# EAGLE board BrickPi 1.6 (EAGLE 6.3)
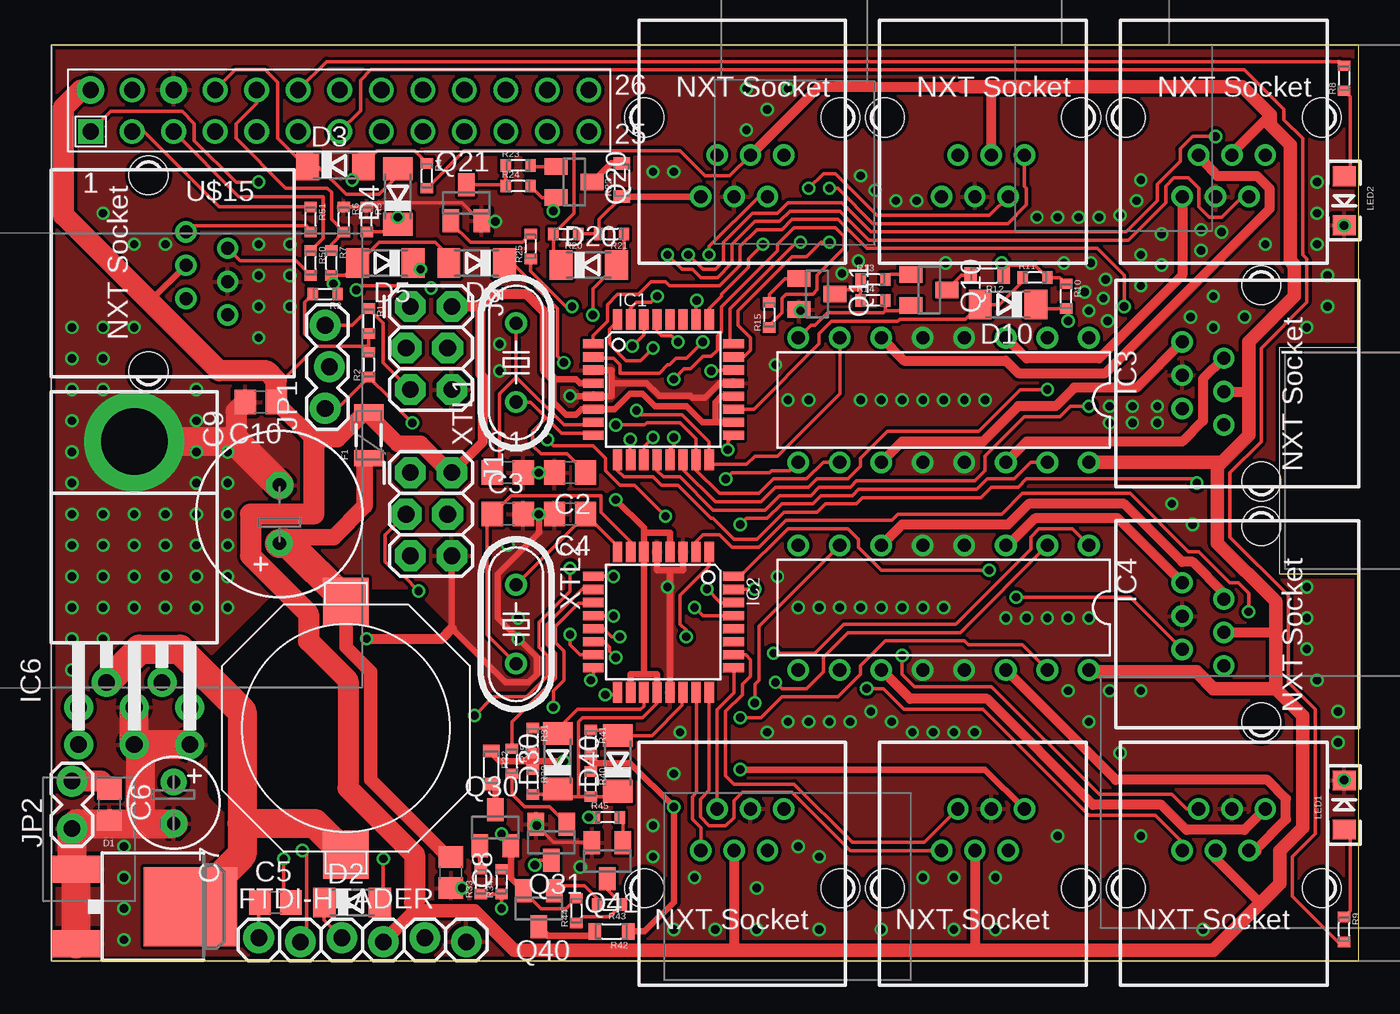
[diagram p0: board, top side]
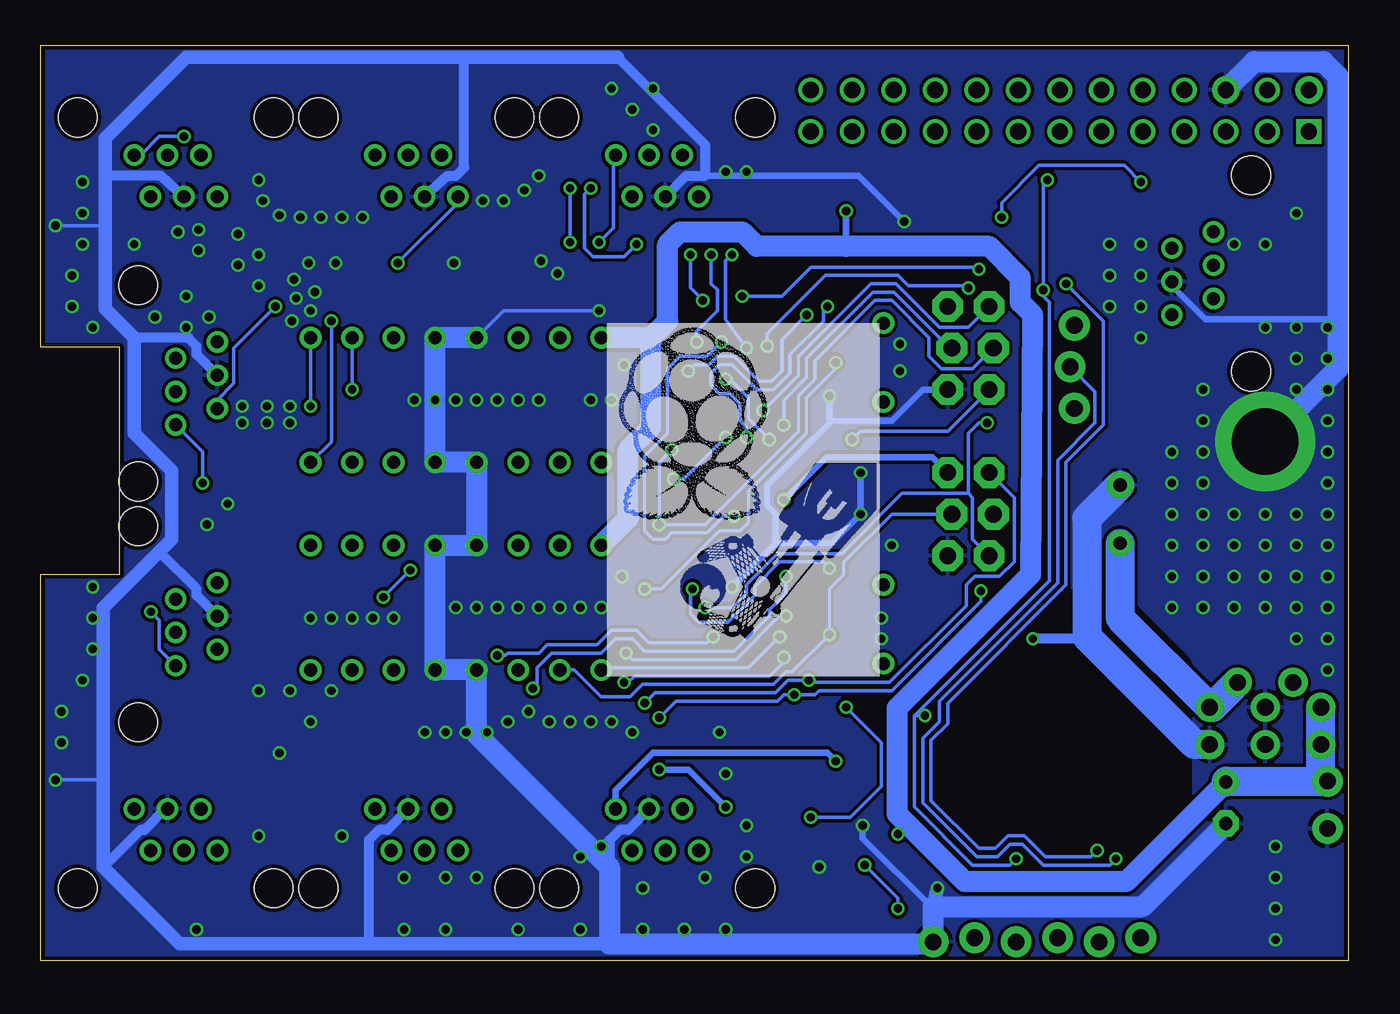
[diagram p1: board, bottom side, seen from below]

Size 80.01 x 56.01 mm. Coordinates in mm from the lower left corner, seen from the top.
Outline: 0,0 80.01,0 80.01,23.62 75.18,23.62 75.18,37.52 80.01,37.52 80.01,56.01 0,56.01 0,0
Copper layers (1*16): Top 0.035mm / dielectric 1.5mm / Bottom 0.035mm
Design rules "Fusion_eagle_rule_v1.1": minimum track width 6mil, minimum drill 12mil, track to track 6mil, track to pad 6mil, pad to pad 6mil, via to via 6mil, smd to smd 0mil, copper to edge 10mil, drill to drill 10mil, minimum pad ring 10mil, minimum via ring 6mil, stop-mask expansion 2mil, vias tented up to drill 100mil, thermal gap 10mil
tRestrict: area 10.4,6.6 to 25.7,21.8
bRestrict: area 10.4,6.6 to 25.7,21.8

## Footprints (pad centres in the part's own frame; a part is rotated, then mirrored left to right if it is on the bottom)
C0805 = smd 1.3 x 1.5: 1 -0.95,0; 2 0.95,0
E2,5-6 = drill 0.813 pad 1.6: + -1.27,0 | drill 0.813 pad 1.6 octagon: - 1.27,0
E3,5-10 = drill 0.813 pad 1.6: + -1.778,0 | drill 0.813 pad 1.6 octagon: - 1.778,0
DPAK = smd 1.651 x 2.921: 1 -2.286,-5.334; 3 2.286,-5.334 | smd 4.826 x 5.715: 4 0,1.651
SOD80C = smd 1.4 x 1.8: A 1.7,0; C -1.7,0
PTC-1206 = smd 1 x 1.8: 1 -1.4,0; 2 1.4,0
1X06_LOCK = drill 1.016 pad 1.88: 1 0,0; 2 2.54,-0.254; 3 5.08,0; 4 7.62,-0.254; 5 10.16,0; 6 12.7,-0.254
TQFP32-08 = smd 1.27 x 0.559: 1 -4.293,2.8; 2 -4.293,2; 3 -4.293,1.2; 4 -4.293,0.4; 5 -4.293,-0.4; 6 -4.293,-1.2; 7 -4.293,-2; 8 -4.293,-2.8; 17 4.293,-2.8; 18 4.293,-2; 19 4.293,-1.2; 20 4.293,-0.4; 21 4.293,0.4; 22 4.293,1.2; 23 4.293,2; 24 4.293,2.8 | smd 0.559 x 1.27: 9 -2.8,-4.293; 10 -2,-4.293; 11 -1.2,-4.293; 12 -0.4,-4.293; 13 0.4,-4.293; 14 1.2,-4.293; 15 2,-4.293; 16 2.8,-4.293; 25 2.8,4.293; 26 2,4.293; 27 1.2,4.293; 28 0.4,4.293; 29 -0.4,4.293; 30 -1.2,4.293; 31 -2,4.293; 32 -2.8,4.293
DIL16-ROUND-HEAT_DIS_SN754410 = drill 0.813: 1 -8.89,-3.81; 2 -6.35,-3.81; 3 -3.81,-3.81; 4 -1.27,-3.81; 5 1.27,-3.81; 6 3.81,-3.81; 7 6.35,-3.81; 8 8.89,-3.81; 9 8.89,3.81; 10 6.35,3.81; 11 3.81,3.81; 12 1.27,3.81; 13 -1.27,3.81; 14 -3.81,3.81; 15 -6.35,3.81; 16 -8.89,3.81
TO220-5-H = drill 1.016 pad 1.778: 1 -3.404,-21.59; 2 -1.702,-17.78; 3 0,-21.59; 4 1.702,-17.78; 5 3.404,-21.59 | drill 4.064 pad 6.096: 6 0,-3.048
TO220-H = drill 1.016 pad 1.778: 1 -3.404,-19.304; 2 0,-19.304; 3 3.404,-19.304 | drill 4.064 pad 6.096: 4 0,-3.048
2X3_LOCK = drill 1.016 pad 1.88 octagon: 1 0,0; 2 0,2.54; 3 2.54,-0.254; 4 2.54,2.286; 5 5.08,0; 6 5.08,2.54
1X03_LOCK = drill 1.016 pad 1.88: 1 0,0.127; 2 2.54,-0.127; 3 5.08,0.127
1X02_LOCK = drill 1.016 pad 1.88: 1 -0.178,0; 2 2.718,0
LED-1206 = smd 1.2 x 1.4: A -1.5,0; C 1.5,0
SOT23 = smd 1 x 1.4: 1 -0.95,-1.1; 2 0.95,-1.1; 3 0,1.1
0603 = smd 0.635 x 0.762: 1 -0.762,0; 2 0.762,0
0805 = smd 0.762 x 1.016: 1 -1.016,0; 2 1.016,0
NXT-SOCKET = drill 0.8 pad 1.3: 1 0,0; 2 -1,-2.54; 3 -2.04,0; 4 -3.04,-2.54; 5 -4.08,0; 6 -5.08,-2.54 | hole 2.36: -8.54,-4.84; 3.46,-4.84
INDUCTOR_PULSE_P0250.XXXNL = smd 2.794 x 2.921: P$1 0,7.747; P$2 0,-7.747
RASPBERRY-PI_REV1 = drill 1 square: 1 -41.91,21.59 | drill 1 pad 1.676: 2 -41.91,24.13; 6 -36.83,24.13 | drill 1: 3 -39.37,21.59; 4 -39.37,24.13; 5 -36.83,21.59; 7 -34.29,21.59; 8 -34.29,24.13; 9 -31.75,21.59; 10 -31.75,24.13; 11 -29.21,21.59; 12 -29.21,24.13; 13 -26.67,21.59; 14 -26.67,24.13; 15 -24.13,21.59; 16 -24.13,24.13; 17 -21.59,21.59; 18 -21.59,24.13; 19 -19.05,21.59; 20 -19.05,24.13; 21 -16.51,21.59; 22 -16.51,24.13; 23 -13.97,21.59; 24 -13.97,24.13; 25 -11.43,21.59; 26 -11.43,24.13
HC49/S = drill 0.813: 1 -2.413,0; 2 2.413,0

## Placement (x,y rotation side)
C1  22pF  [C0805]  27.94,29.84 0 top
C2  22pF  [C0805]  31.75,29.84 180 top
C3  22pF  [C0805]  27.94,27.3 0 top
C4  22pF  [C0805]  31.75,27.3 180 top
C5  0.1uf  [C0805]  13.72,3.56 0 top
C6  0.1uf  [C0805]  3.56,9.53 270 top
C7  120uf  [E2,5-6]  7.49,9.65 270 top
C8  0.1uf  [C0805]  24.46,5.39 270 top
C9  1000uf  [E3,5-10]  13.97,27.3 90 top
C10  0.1uf  [C0805]  12.83,34.16 180 top
D1  DIODE_SCHOTTKY_VS-6CWQ04FNTRPBF  [DPAK]  6.86,3.3 270 top
D2  [SOD80C]  18.41,3.56 0 top
D3  [SOD80C]  17.4,48.64 0 top
D4  [SOD80C]  21.21,46.74 90 top
D5  [SOD80C]  20.45,42.67 180 top
D6  [SOD80C]  26.04,42.67 180 top
D10  [SOD80C]  58.55,40.13 180 top
D20  [SOD80C]  32.89,42.55 0 top
D30  [SOD80C]  30.99,12.19 90 top
D40  [SOD80C]  34.67,12.06 90 top
F1  PTCSMD  [PTC-1206]  19.43,32.13 90 top
FTDI-HEADER  [1X06_LOCK]  12.7,1.4 0 top
IC1  ATMEGA48/88/168/328-TQFP-AU  [TQFP32-08]  37.47,34.92 0 top
IC2  ATMEGA48/88/168/328-TQFP-AU  [TQFP32-08]  37.47,20.7 270 top
IC3  SN754410  [DIL16-ROUND-HEAT_DIS_SN754410]  54.61,34.29 180 top
IC4  SN754410  [DIL16-ROUND-HEAT_DIS_SN754410]  54.61,21.59 180 top
IC5  LM2576  [TO220-5-H]  5.08,34.8 0 top
IC6  REGULATOR_5V_TO220-H_7805  [TO220-H]  5.08,34.8 0 top
J1  AVR_SPI_PRG_62X3_LOCK  [2X3_LOCK]  21.97,29.84 270 top
J2  AVR_SPI_PRG_62X3_LOCK  [2X3_LOCK]  21.97,40.01 270 top
JP1  [1X03_LOCK]  16.89,33.78 90 top
JP2  [1X02_LOCK]  1.27,8.26 90 top
LED1  [LED-1206]  79.12,9.53 90 top
LED2  [LED-1206]  79.12,46.48 270 top
Q10  [SOT23]  53.72,41.02 270 top
Q11  [SOT23]  46.86,40.77 270 top
Q20  [SOT23]  32,47.62 270 top
Q21  [SOT23]  25.4,46.35 0 top
Q30  [SOT23]  27.18,8.13 0 top
Q31  [SOT23]  30.61,7.24 180 top
Q40  [SOT23]  29.84,3.17 180 top
Q41  [SOT23]  34.04,6.1 180 top
R1  10k  [0603]  19.43,39.12 270 top
R2  10k  [0603]  19.43,36.45 90 top
R3  2k4  [0603]  16.76,40.77 180 top
R4  10k  [0603]  22.99,48.01 270 top
R5  4k7  [0603]  19.3,45.34 270 top
R6  4k7  [0603]  17.91,45.34 270 top
R7  2k4  [0603]  17.14,42.67 270 top
R8  220  [0603]  79.12,53.98 90 top
R9  220  [0603]  79.12,1.91 270 top
R10  10k  [0603]  62.1,40.64 270 top
R11  4k7  [0603]  60.2,41.78 0 top
R12  100  [0805]  57.28,41.91 180 top
R13  4k7  [0603]  50.29,41.66 0 top
R14  10k  [0603]  50.29,40.39 0 top
R15  4k7  [0603]  43.94,39.5 90 top
R20  10k  [0603]  31.5,44.45 180 top
R21  4k7  [0603]  34.29,44.45 180 top
R22  100  [0805]  34.92,47.75 90 top
R23  4k7  [0603]  28.57,48.64 0 top
R24  10k  [0603]  28.57,47.37 0 top
R25  4k7  [0603]  29.34,43.69 90 top
R30  10k  [0603]  29.46,10.92 270 top
R31  4k7  [0603]  29.46,13.46 270 top
R32  100  [0805]  26.92,11.81 270 top
R33  4k7  [0603]  26.29,4.83 90 top
R34  10k  [0603]  27.56,4.83 90 top
R35  4k7  [0603]  28.19,12.19 270 top
R40  10k  [0603]  33.02,10.79 270 top
R41  4k7  [0603]  33.02,13.34 270 top
R42  100  [0805]  34.29,1.78 180 top
R43  4k7  [0603]  34.16,3.43 180 top
R44  10k  [0603]  32.13,3.05 90 top
R45  4k7  [0603]  34.04,8.76 0 top
R50  2k4  [0603]  15.88,42.67 270 top
R51  2k4  [0603]  15.88,45.34 270 top
U$3  NXT-SOCKETREGULAR  [NXT-SOCKET]  69.22,46.74 180 top
U$4  NXT-SOCKETREGULAR  [NXT-SOCKET]  69.22,37.85 90 top
U$5  NXT-SOCKETREGULAR  [NXT-SOCKET]  69.22,23.11 90 top
U$7  NXT-SOCKETREGULAR  [NXT-SOCKET]  74.3,9.27 0 top
U$8  NXT-SOCKETREGULAR  [NXT-SOCKET]  54.48,46.74 180 top
U$9  NXT-SOCKETREGULAR  [NXT-SOCKET]  39.75,46.74 180 top
U$10  NXT-SOCKETREGULAR  [NXT-SOCKET]  44.83,9.27 0 top
U$11  NXT-SOCKETREGULAR  [NXT-SOCKET]  59.56,9.27 0 top
U$12  NXT-SOCKETREGULAR  [NXT-SOCKET]  10.79,39.5 270 top
U$14  INDUCTOR_PULSE_P0250.XXXNL  [INDUCTOR_PULSE_P0250.XXXNL]  18.03,14.22 0 top
U$15  RASPBERRY-PI_REV1  [RASPBERRY-PI_REV1]  44.32,29.13 0 top
XTL1  [HC49/S]  28.45,36.58 90 top
XTL2  [HC49/S]  28.45,20.57 270 top

## Library data of the parts
C1-C10 = rcl
D1 IC1-IC6 J1 J2 R1-R15 R20-R25 R30-R35 R40-R45 R50 R51 U$3-U$5 U$7-U$12 U$14 = zz My Parts
D2-D6 D10 D20 D30 D40 = diode
F1 FTDI-HEADER JP1 JP2 = zz SparkFun
LED1 LED2 = SparkFun-LED
Q10 Q11 Q20 Q21 Q30 Q31 Q40 Q41 = semicon-smd-ipc
U$15 = RaspberryPi
XTL1 XTL2 = crystal; OC_FARNELL: 1667008; OC_NEWARK: unknown

## Nets
+3V3: D4.C R5.2 U$15.1
+5V: C10.1 D10.C D20.C D30.C D40.C F1.2 FTDI-HEADER.4 IC1.4 IC1.6 IC1.18 IC1.20 IC2.4 IC2.6 IC2.18 IC2.20 IC3.16 IC4.16 J1.2 J2.2 R1.2 R2.2 R3.2 R4.2 R10.2 R20.2 R30.2 R40.2 U$3.4 U$4.4 U$5.4 U$7.4 U$8.4 U$9.4 U$10.4 U$11.4 U$12.4 U$15.2
FTDI-RESET: C5.2 JP1.2
FTDI-TX: D2.C FTDI-HEADER.3
GND: C1.2 C2.2 C3.2 C4.2 C6.2 C7.- C8.2 C9.- C10.2 D1.1 D1.3 FTDI-HEADER.6 IC1.3 IC1.5 IC1.21 IC2.3 IC2.5 IC2.21 IC3.4 IC3.5 IC3.12 IC3.13 IC4.4 IC4.5 IC4.12 IC4.13 IC5.3 IC5.5 IC5.6 IC6.2 IC6.4 J1.6 J2.6 JP2.1 LED1.C LED2.C Q11.2 Q21.2 Q31.2 Q41.2 R5.1 R6.1 U$3.3 U$4.3 U$5.3 U$7.3 U$8.3 U$9.3 U$10.3 U$11.3 U$12.3 U$15.6
M1-RESET: IC1.29 J2.5 JP1.3 R1.1
M1-TX: D5.C IC1.31
M2-RESET: IC2.29 J1.5 JP1.1 R2.1
M2-TX: D6.C IC2.31
M-RX: D2.A D3.A IC1.30 IC2.30 R4.1
MADIR: IC1.16 IC3.7 J2.1
MAEN: IC1.12 IC3.1
MAO0: IC3.3 U$3.1
MAO1: IC3.6 U$3.2
MAPWM: IC1.14 IC3.2
MAT0: IC1.32 U$3.5
MAT1: IC1.2 U$3.6
MBDIR: IC1.17 IC3.15 J2.3
MBEN: IC1.13 IC3.9
MBO0: IC3.11 U$4.1
MBO1: IC3.14 U$4.2
MBPWM: IC1.15 IC3.10 J2.4
MBT0: IC1.1 U$4.5
MBT1: IC1.9 U$4.6
MCDIR: IC2.16 IC4.7 J1.1
MCEN: IC2.12 IC4.1
MCO0: IC4.3 U$5.1
MCO1: IC4.6 U$5.2
MCPWM: IC2.14 IC4.2
MCT0: IC2.32 U$5.5
MCT1: IC2.2 U$5.6
MDDIR: IC2.17 IC4.15 J1.3
MDEN: IC2.13 IC4.9
MDO0: IC4.11 U$7.1
MDO1: IC4.14 U$7.2
MDPWM: IC2.15 IC4.10 J1.4
MDT0: IC2.1 U$7.5
MDT1: IC2.9 U$7.6
N$1: D1.4 IC5.2 U$14.P$2
N$2: C5.1 FTDI-HEADER.1
N$3: LED2.A R8.1
N$4: LED1.A R9.1
N$5: C1.1 IC1.7 XTL1.2
N$6: R9.2 U$15.13
N$7: C2.1 IC1.8 XTL1.1
N$8: Q11.1 R15.2
N$9: Q20.3 R22.2
N$10: Q21.1 R25.2
N$11: R6.2 R7.1 U$15.10
N$12: R8.2 U$15.12
N$13: Q11.3 R13.1 R14.1
N$14: C3.1 IC2.7 XTL2.2
N$15: C4.1 IC2.8 XTL2.1
N$16: Q21.3 R23.1 R24.1
N$17: Q20.1 R23.2
N$18: IC2.27
N$19: IC2.28
N$20: Q30.3 R32.2
N$21: Q31.1 R35.2
N$22: Q10.1 R13.2
N$23: Q31.3 R33.1 R34.1
N$24: Q30.1 R33.2
N$25: Q10.3 R12.2
N$26: Q40.3 R42.2
N$27: IC1.27
N$28: IC1.28
N$29: R50.2 U$12.5
N$30: R51.2 U$12.6
N$31: R51.1 U$15.3
N$32: R50.1 U$15.5
N$33: Q41.1 R45.2
N$34: Q41.3 R43.1 R44.1
N$35: Q40.1 R43.2
REG_OUT: C8.1 C9.+ F1.1 IC5.4 IC6.3 U$14.P$1
RPI-FTDI-RX: D5.A D6.A FTDI-HEADER.2 R3.1 R7.2
RPI-TX: D3.C D4.A U$15.8
S1ADC: D10.A IC1.19 R11.1
S1ANA: R10.1 R11.2 R12.1 U$8.1
S1POW: IC1.10 R15.1
S1SCL: IC1.25 U$8.5
S1SDA: IC1.23 U$8.6
S2ADC: D20.A IC1.22 R21.1
S2ANA: R20.1 R21.2 R22.1 U$9.1
S2POW: IC1.11 R25.1
S2SCL: IC1.26 U$9.5
S2SDA: IC1.24 U$9.6
S3ADC: D30.A IC2.19 R31.1
S3ANA: R30.1 R31.2 R32.1 U$10.1
S3POW: IC2.10 R35.1
S3SCL: IC2.25 U$10.5
S3SDA: IC2.23 U$10.6
S4ADC: D40.A IC2.22 R41.1
S4ANA: R40.1 R41.2 R42.1 U$11.1
S4POW: IC2.11 R45.1
S4SCL: IC2.26 U$11.5
S4SDA: IC2.24 U$11.6
VCC: C6.1 C7.+ IC3.8 IC4.8 IC5.1 IC6.1 JP2.2 Q10.2 Q20.2 Q30.2 Q40.2 R14.2 R24.2 R34.2 R44.2

## Tracks (layer width: path | path; a pad name or v marks a point on that pad's centre or on a via)
+3V3  (via drill 0.51)
  Top 0.203: R5.2 20.75,44.58 D4.C v21.21,45.47 | U$15.1 3.63,51.94 8,51.94 8.76,51.18 8.76,50.16 11.3,47.62 v12.7,47.62
  Bottom 0.203: v12.7,47.62 13.72,48.64 18.92,48.64 21.21,46.35 v21.21,45.47
+5V  (via drill 0.51)
  Top 0.203: 16.26,37.59 14.16,35.5 13.78,35.5 | 16.26,37.59 15.49,38.35 15.49,40.26 R3.2 | D10.C 60.5,39.88 R10.2 62.23,39.75 v62.23,39.12 | R2.2 19.43,37.59 | 19.43,37.59 R1.2 | 16.26,37.59 19.43,37.59 | D20.C 30.73,43 R20.2 32,45.72 32,49.53 | R4.2 25.27,49.53 32,49.53 | U$9.4 41.52,48.01 40.01,48.01 38.48,49.53 32,49.53 | R30.2 30.78,10.16 D30.C 31.32,10.03 32.26,10.03 | D40.C 34.34,10.03 R40.2 32.26,10.03 | IC2.20 37.06,15.73 36.2,14.86 32.51,14.86 32.26,14.61 32.26,10.03
  Top 0.406: IC2.18 35.47,17.53 36.32,17.53 | 36.32,17.53 37.06,17.53 IC2.20 | 36.27,26.16 IC2.6 36.27,17.58 36.32,17.53 | 36.27,26.16 37.08,26.16 37.87,26.16 IC2.4 | U$12.4 6.03,40.32 | v34.54,28.19 36.27,26.47 36.27,26.16 | IC1.4 32.37,35.33 32.13,35.56 30.73,35.56 30.73,34.16 31.5,33.4 32.13,33.4 32.45,33.73 IC1.6 34.49,33.73 35.43,34.67 36.2,34.67 36.96,33.91 38.86,33.91 39.75,33.02 39.85,32.92 40.64,32.92 40.77,32.92 | IC1.18 40.77,32.92 | IC1.20 41,34.52 40.64,34.16 40.64,33.05 40.77,32.92
  Top 0.61: U$8.4 57.52,53.46 57.53,53.47 | 72.25,49.4 74.61,51.75 | U$7.4 71.25,6.21 73.98,3.49 | U$11.4 56.52,0.64 | U$10.4 41.79,0.75 | U$9.4 46.98,53.47 55.75,53.47 | U$5.4 74.92,20.07 74.93,20.07 | U$4.4 73.27,34.81 73.28,33.78 | J1.2 26.42,31.75 26.42,35.69 26.29,35.81 26.29,40.01 | 26.29,40.01 J2.2 | 26.29,40.01 27.05,40.77 29.08,40.77 30.23,39.62 30.23,36.07 30.73,35.56
  Top 0.813: 56.52,0.64 71.12,0.64 73.98,3.49 75.18,4.7 75.18,6.73 76.58,8.13 76.58,14.99 74.93,16.64 | 56.52,0.64 41.91,0.64 | 41.91,0.64 34.29,0.64 31.88,0.64 28.32,0.64 25.91,3.05 23.37,3.05 22.23,3.05 | U$3.4 72.25,49.4 | 56.52,0.64 | 41.79,0.75 41.91,0.64 | 55.75,53.47 57.53,53.47 72.9,53.47 74.61,51.75 74.61,51.12 75.82,49.91 75.82,42.8 76.07,42.55 76.07,40.64 73.28,37.85 73.28,33.78 73.28,32.13 71.63,30.48 71.37,30.48 | 22.23,3.05 FTDI-HEADER.4 | IC3.16 71.37,30.48 | IC4.16 63.63,17.65 70.1,17.65 71.12,16.64 74.93,16.64 | 71.37,30.48 71.37,25.53 74.93,21.97 74.93,20.07 74.93,16.64 | 22.23,3.56 22.23,3.05
  Top 1.016: F1.2 19.18,33.53 17.53,31.88 16.06,31.88 C10.1 | J1.2 24.38,29.84 22.61,31.62 21.21,31.62 19.43,33.4 F1.2 | F1.2
  Top 1.27: U$15.2 1.83,53.26 0.76,52.2 0.76,45.59 6.03,40.32 10.29,36.07 13.21,36.07 13.78,35.5 C10.1 | 16.06,31.88 16.06,27.3 12.19,27.3 12.19,24.77 15.75,21.21 15.75,19.56 18.16,17.14 18.16,10.54 22.23,6.48 22.23,3.56
  Bottom 0.203: v62.23,39.12 62.23,31.75 IC3.16
  Bottom 0.406: J1.2 25.46,30.8 31.94,30.8 v34.54,28.19
FTDI-RESET  (via drill 0.51)
  Top 0.203: C5.2 14.22,4 v14.22,6.22
  Bottom 0.203: JP1.2 15.49,34.8 15.49,32.89 17.78,30.61 17.78,23.11 25.02,15.88 25.02,14.61 26.04,13.59 26.04,9.65 22.73,6.35 21.46,6.35 20.7,7.11 19.94,7.11 18.67,5.84 14.61,5.84 v14.22,6.22
FTDI-TX
  Top 0.203: FTDI-HEADER.3 16.71,2.46 D2.C
GND  (via drill 0.51)
  Top 0.203: C4.2 v29.84,27.3 C3.2 | C2.2 v29.84,29.84 C1.2 | LED1.C v79.12,11.05 | LED2.C v79.12,44.96 | Q11.2 45.78,39.82 v45.85,39.75 | R6.1 R5.1 19.56,46.35 25.15,46.35 26.25,45.26 Q21.2 | Q41.2 33.04,7.24 30.73,7.24 v29.72,8.26 29.66,8.32 Q31.2
  Top 0.406: IC2.5 37.06,23.88 37.85,23.88 | 37.85,23.88 37.97,23.88 38.66,23.88 IC2.3 | IC2.21 37.87,22.86 | 37.87,22.86 37.87,23.86 37.85,23.88 | IC1.3 34.29,36.12 34.29,35.31 | 34.29,35.31 34.29,34.52 IC1.5 31.77,34.52 v31.75,34.54 | v29.84,27.3 29.84,26.16 27.3,23.62 27.3,20.95 29.72,18.54 29.72,17.53 29.21,17.02 27.81,17.02 24.51,20.32 J1.6 | v37.72,22.86 37.87,22.86 | 34.29,35.31 34.31,35.33 36.43,35.33 37.21,34.54 39.12,34.54 39.24,34.42 40.01,34.42 40.89,35.31 41.74,35.31 IC1.21 | v27.18,45.21 26.39,45.21 Q21.2 | 29.66,8.32 v29.72,8.26
  Top 0.61: v19.3,19.68 23.88,19.68 24.51,20.32
  Top 0.813: v25.15,4.45 25.15,4.44 C8.2
  Top 1.27: C6.2 3.56,8.38 | C10.2 11.3,33.59 11.3,31.75
  Top 1.778: D1.3 D1.1 1.27,5.84 JP2.1 1.57,8.38 3.56,8.38 5.46,8.38 | 5.46,8.38 C7.- | C9.- 11.3,31.75 IC6.4 | IC5.5 5.46,13.21 | 5.46,13.21 IC5.3 IC6.2 | 5.46,8.38 5.46,13.21
  Bottom 0.203: v79.12,11.05 76.2,11.05 | v79.12,44.96 76.07,44.96 | v45.85,39.75 51.69,39.75 IC3.5
  Bottom 0.406: 35.05,25.53 31.62,25.53 v29.84,27.3 v29.84,29.84 | 35.05,25.53 v37.72,22.86 | U$12.3 10.79,41.27 8.76,39.24 0.64,39.24 | J2.6 26.04,34.92 27.94,33.02 31.62,33.02 | 31.62,33.02 35.56,29.08 35.56,27.81 35.05,27.3 35.05,25.53 | 31.62,33.02 31.75,33.15 v31.75,34.54 | 39.37,48.01 29.97,48.01 v27.18,45.21 | v29.72,8.26 29.72,7.49 25.4,3.17
  Bottom 0.61: U$9.3 40.52,48.01 39.37,48.01 39.37,49.91 44.7,55.24 | U$8.3 55.13,48.01 54.61,48.01 54.1,48.51 54.1,55.24 | U$10.3 44.06,8 44.58,8 45.21,7.37 45.21,5.71 | U$11.3 58.79,8 59.31,8 59.94,7.37 59.94,1.02 | U$4.3 70.48,37.08 70.48,37.59 70.99,38.1 74.3,38.1 | U$3.3 72.65,48.01 76.07,48.01 | 72.39,9.27 73.66,8 73.91,8 76.2,5.71 | U$5.3 70.48,22.34 70.48,22.73 72.77,25.02 | 16,19.81 16.13,19.68 v19.3,19.68
  Bottom 0.813: 45.21,1.02 59.94,1.02 71.5,1.02 76.2,5.71 76.2,11.05 76.2,21.59 72.77,25.02 72.01,25.78 72.01,29.97 74.3,32.26 74.3,38.1 76.07,39.88 76.07,44.96 76.07,48.01 76.07,50.29 71.12,55.24 54.1,55.24 44.7,55.24 | U$7.3 72.39,9.27 | 25.4,3.3 v25.15,4.45
  Bottom 1.27: IC3.5 IC3.4 IC3.13 IC3.12 IC4.5 IC4.4 IC4.13 IC4.12 53.34,13.84 45.21,5.71 45.21,1.02 25.4,1.02 FTDI-HEADER.6 25.4,3.17 25.4,3.3 12.57,3.3 C7.- | U$15.6 5.77,54.99 1.52,54.99 0.64,54.1 0.64,39.24 0.64,36.2 IC6.4
  Bottom 1.778: IC5.5 9.4,13.21 16,19.81 16,27.05 C9.-
  other vias: 1.27,27.3 5.08,27.3 3.17,27.3 6.99,27.3 8.89,27.3 1.27,25.4 3.17,25.4 5.08,25.4 6.99,25.4 8.89,25.4 10.79,29.21 10.79,31.11 8.89,29.21 8.89,31.11 8.89,33.02 1.27,33.02 1.27,31.11 1.27,29.21 1.27,23.5 3.17,23.5 5.08,23.5 6.99,23.5 8.89,23.5 8.89,21.59 6.99,21.59 5.08,21.59 3.17,21.59 1.27,21.59 10.79,27.3 10.79,25.4 10.79,23.5 10.79,21.59 1.27,19.68 3.17,19.68 1.27,17.78 4.45,1.27 4.45,3.17 4.45,5.08 4.45,6.99 14.61,41.91 12.7,41.91 12.7,40.01 14.61,40.01 12.7,38.1 12.7,43.81 14.61,43.81 6.99,43.81 5.08,43.81 3.17,45.72 1.27,34.92 3.17,34.92 8.89,34.92 43.81,13.97 45.09,14.61 46.35,14.61 51.44,14.61 52.7,13.97 53.98,13.97 55.24,13.97 56.52,13.97 66.67,7.62 70.48,1.91 57.78,1.91 57.78,5.08 61.59,7.62 55.24,1.91 55.24,5.08 53.34,5.08 46.99,1.91 43.18,4.45 46.99,6.35 50.8,1.91 45.72,6.99 62.23,16.51 63.5,14.61 65.41,12.7 64.77,16.51 66.67,16.51 78.74,13.34 78.74,15.24 77.47,17.14 76.83,19.05 76.83,20.95 76.83,22.86 76.83,38.73 78.11,40.01 78.11,41.91 77.47,43.81 77.47,45.72 77.47,47.62 60.33,45.47 62.87,45.47 64.14,45.47 65.41,45.59 66.67,47.75 52.96,46.48 51.69,46.48 50.42,47.12 49.53,48.01 45.09,53.34 43.81,52.07 42.55,50.8 42.55,53.34 47.62,14.61 38.1,11.43 38.1,1.91 40.64,1.91 32.38,5.71 36.83,8.26 38.48,13.97 43.18,1.91 36.83,6.35 39.37,5.08 48.9,14.61 50.16,15.24 28.57,19.68 28.57,20.95 27.94,25.4 69.85,26.67 68.58,27.94 67.94,44.45 67.94,42.55 66.67,41.27 66.67,43.18 71.12,38.73 71.12,40.64 74.3,43.81 64.64,39.12 63.5,39.75 64.39,40.51 63.25,40.89 64.52,41.66 63.63,42.67 61.98,42.67 64.77,33.91 64.77,32.89 67.69,32.89 67.69,33.91 66.17,33.91 66.17,32.89 69.72,39.37 73.03,39.37 70.36,44.7 71.63,44.58 70.36,43.43 61.59,45.47 66.42,46.48 1.27,36.83 3.17,36.83 1.27,38.73 3.17,38.73 5.08,38.73 38.1,48.26 36.83,48.26 48.39,42.04 49.4,42.8 54.74,42.67 44.32,36.45 57.15,34.29 54.61,34.29 53.34,34.29 52.07,34.29 50.8,34.29 49.53,34.29 55.88,34.29 46.35,34.29 45.09,34.29 54.61,21.59 53.34,21.59 52.07,21.59 50.8,21.59 49.53,21.59 48.26,21.59 46.99,21.59 45.72,21.59 44.45,23.5 58.42,20.95 59.69,20.95 60.96,20.95 62.23,20.95 63.5,20.95 27.43,37.72 27.43,36.07
  pour Top (isolate 0.203): 0,56.01 80.01,56.01 80.01,37.47 75.18,37.47 75.18,23.62 80.01,23.62 80.01,0 0,0
  pour Bottom (isolate 0.203): 0,56.01 80.01,56.01 80.01,37.47 75.18,37.47 75.18,23.62 80.01,23.62 80.01,0 0,0
M1-RESET  (via drill 0.51)
  Top 0.203: IC1.29 37.06,38.5 37.34,38.23 37.97,38.23 v38.35,37.85 | v37.59,27.18 35.69,29.08 34.8,29.08 33.91,29.97 33.91,30.73 33.15,31.5 30.73,31.5 v30.35,31.88 | JP1.3 18.41,38.86 R1.1 20.32,38.99 20.32,36.58 J2.5
  Bottom 0.203: v38.35,37.85 39.24,36.96 40.89,36.96 41.66,36.2 41.66,32.26 43.05,30.86 43.05,26.29 42.55,25.78 41.78,25.78 41.4,26.16 39.24,26.16 38.23,27.18 v37.59,27.18 | v30.35,31.88 29.84,32.38 24.51,32.38 J2.5
M1-TX  (via drill 0.51)
  Top 0.203: IC1.31 35.47,39.91 35.81,40.26 36.7,40.26 v37.08,40.64 | D5.C v22.61,42.29
  Bottom 0.203: v37.08,40.64 34.67,40.64 32.89,42.42 22.73,42.42 v22.61,42.29
M2-RESET  (via drill 0.51)
  Top 0.203: IC2.29 41.74,21.08 39.88,21.08 v39.37,21.59 | v22.1,32.89 20.7,34.29 20.7,34.42 R2.1 17.53,33.78 JP1.1
  Bottom 0.203: J1.5 22.99,25.78 22.99,28.32 23.24,28.57 | v39.37,21.59 37.72,21.59 36.83,22.48 36.83,22.99 34.92,24.89 30.99,24.89 27.3,28.57 23.24,28.57 | v22.1,32.89 22.61,32.89 23.24,32.26 23.24,28.57
M2-TX  (via drill 0.51)
  Top 0.203: IC2.31 43.02,22.7 v43.05,22.73 | v31.37,36.58 30.99,36.96 30.99,39.88 28.19,42.67 D6.C
  Bottom 0.203: v43.05,22.73 42.04,22.73 38.48,26.29 37.21,26.29 36.7,26.8 36.7,28.7 33.15,32.26 33.15,34.42 31.37,36.2 v31.37,36.58
M-RX  (via drill 0.51)
  Top 0.203: D2.A 20.32,3.76 v20.32,6.22 | IC2.30 40.96,21.9 v40.13,22.73 | v31.75,24 31.75,22.61 29.84,20.7 29.84,19.18 30.35,18.67 30.35,17.4 29.08,16.13 27.05,16.13 v25.91,14.99 | IC1.30 36.27,38.3 v35.56,37.59 | R4.1 22.23,49.53 19.94,49.53 19.1,48.69 D3.A 18.41,47.96 v18.41,47.75 | v23.24,41.15 23.11,41.27 18.92,41.27 v18.67,41.02
  Bottom 0.203: v20.32,6.22 20.7,5.84 22.99,5.84 26.54,9.4 26.54,14.99 | 26.54,14.99 18.29,23.24 18.29,40.26 18.67,40.64 v18.67,41.02 18.67,47.5 v18.41,47.75 | v40.13,22.73 40.26,22.61 40.26,21.21 39.75,20.7 37.97,20.7 36.32,22.35 36.32,22.86 34.8,24.38 32.13,24.38 v31.75,24 | v25.91,14.99 26.54,14.99 | v35.56,37.59 35.56,38.35 32,41.91 27.56,41.91 26.92,41.27 23.37,41.27 v23.24,41.15
MADIR  (via drill 0.51)
  Top 0.203: IC3.7 48.26,34.67 44.45,30.86 43.05,30.86 42.55,30.35 40.37,30.35 IC1.16 40.27,31.74 38.61,33.4 36.07,33.4 v35.81,33.66
  Bottom 0.203: J2.1 23.24,38.73 25.02,38.73 27.69,41.4 29.21,41.4 33.66,36.96 33.66,35.81 35.18,34.29 v35.81,33.66
MAEN  (via drill 0.51)
  Top 0.203: v63.5,33.91 62.36,33.91 61.72,33.27 59.56,33.27 57.15,30.86 57.15,29.97 56.52,29.34 49.28,29.34 48.9,28.96 46.99,28.96 46.48,28.45 44.58,28.45 43.69,27.56 40.51,27.56 38.48,29.59 37.47,29.59 37.08,29.97 37.08,30.61 IC1.12
  Bottom 0.203: IC3.1 v63.5,33.91
MAO0
  Top 0.61: U$3.1 69.22,41.91 64.14,36.83 59.69,36.83 IC3.3
MAO1
  Top 0.61: U$3.2 71.36,48.01 73.79,48.01 74.55,47.24 74.55,45.97 64.52,35.94 59.18,35.94 58.42,36.7 52.2,36.7 IC3.6
MAPWM  (via drill 0.51)
  Top 0.203: v60.96,34.92 59.31,34.92 56.77,32.38 51.18,32.38 49.53,30.73 49.53,30.23 48.77,29.46 46.86,29.46 46.35,28.96 44.32,28.96 43.43,28.07 40.64,28.07 38.73,29.97 38.73,30.56 IC1.14
  Bottom 0.203: IC3.2 v60.96,34.92
MAT0  (via drill 0.51)
  Top 0.203: U$3.5 72.9,46.74 71.63,45.47 70.87,45.47 70.23,46.1 70.23,47.24 69.6,47.88 68.71,47.88 68.2,47.37 68.2,46.35 65.91,44.07 50.04,44.07 48.26,45.85 45.21,45.85 44.58,45.21 43.05,45.21 41.66,43.81 41.66,42.67 40.77,41.78 39.75,41.78 39.24,42.29 38.61,42.29 v37.72,43.18 | v36.83,37.47 36.07,36.7 35.18,36.7 34.16,37.72 34.16,38.61 34.66,39.11 IC1.32
  Bottom 0.203: v37.72,43.18 38.1,42.8 38.1,39.24 v36.83,37.47
MAT1  (via drill 0.51)
  Top 0.203: v71.25,50.42 69.85,50.42 69.09,49.66 69.09,48.9 67.69,47.5 67.69,46.48 65.79,44.58 50.16,44.58 48.39,46.35 45.09,46.35 44.45,45.72 42.93,45.72 41.15,43.94 41.15,42.8 40.64,42.29 39.88,42.29 v38.99,43.18 | IC1.2 33.2,36.96 33.33,36.83 34.42,36.83 34.8,36.45 34.8,35.94 37.21,35.94 37.72,36.45 37.85,36.45 38.23,36.83 38.86,36.83 v39.88,37.85
  Bottom 0.203: U$3.6 73.91,49.28 72.77,50.42 v71.25,50.42 | v38.99,43.18 38.99,41.4 38.61,41.02 38.61,39.75 39.88,38.48 v39.88,37.85
MBDIR  (via drill 0.51)
  Top 0.203: IC3.15 59.94,30.48 58.93,29.46 57.28,29.46 56.64,28.83 49.4,28.83 49.02,28.45 47.12,28.45 46.61,27.94 44.7,27.94 43.81,27.05 42.55,27.05 v42.16,26.67 | v41.4,31.24 41.4,31.77 IC1.17
  Bottom 0.203: J2.3 22.99,36.2 24.89,36.2 25.65,36.96 25.65,38.1 27.94,40.39 28.96,40.39 32.64,36.7 32.64,35.56 33.66,34.54 33.66,32.38 39.37,26.67 v42.16,26.67 42.16,30.48 v41.4,31.24
MBEN  (via drill 0.51)
  Top 0.203: v38.1,32 38.1,31.5 37.85,31.24 37.85,30.65 IC1.13 | v41.27,29.46 41.66,29.84 43.94,29.84 44.07,29.97 45.21,29.97 IC3.9
  Bottom 0.203: v38.1,32 40.64,29.46 v41.27,29.46
MBO0
  Top 0.61: U$4.1 66.42,35.05 62.61,35.05 61.47,33.91 59.18,33.91 57.02,31.75 52.07,31.75 IC3.11
MBO1
  Top 0.61: U$4.2 70.48,35.58 70.48,33.02 69.22,31.75 59.69,31.75 IC3.14
MBPWM  (via drill 0.51)
  Top 0.203: IC3.10 47.24,30.48 46.23,29.46 44.2,29.46 43.31,28.57 40.89,28.57 39.47,30 IC1.15 39.47,31.91 38.48,32.89 36.45,32.89 36.32,32.77 v34.54,32.77
  Bottom 0.203: v34.54,32.77 34.54,34.29 33.15,35.69 33.15,36.83 29.08,40.89 27.81,40.89 24.38,37.47 J2.4
MBT0  (via drill 0.51)
  Top 0.203: v65.66,40.01 65.66,41.91 64.01,43.56 49.91,43.56 48.13,45.34 45.34,45.34 44.7,44.7 43.18,44.7 42.16,43.69 42.16,42.55 40.89,41.27 37.85,41.27 37.59,41.53 36.7,41.53 35.94,40.77 34.67,40.77 34.04,40.13 34.04,39.12 33.15,38.23 33.15,37.75 IC1.1
  Bottom 0.203: U$4.5 69.22,34.29 68.2,35.31 68.2,37.47 v65.66,40.01
MBT1  (via drill 0.51)
  Top 0.203: IC1.9 34.66,29.98 35.05,29.59 36.83,29.59 37.34,29.08 38.35,29.08 40.39,27.05 40.51,27.05 41.78,25.78 43.18,25.78 44.83,27.43 46.86,27.43 47.37,27.94 49.28,27.94 49.66,28.32 56.9,28.32 57.53,28.96 59.18,28.96 59.69,29.46 69.85,29.46 v70.1,29.21
  Bottom 0.203: v70.1,29.21 70.1,31.11 U$4.6
MCDIR  (via drill 0.51)
  Top 0.203: IC4.7 43.31,20.45 43.31,17.14 43.05,16.89 v43.05,15.75 | IC2.16 33.17,17.3 v33.02,17.14
  Bottom 0.203: v43.05,15.75 42.42,16.38 35.05,16.38 34.29,17.14 v33.02,17.14 32.89,17.02 28.07,17.02 23.37,21.72 23.37,22.99 22.86,23.5 21.34,23.5 20.45,24.38 20.45,28.32 J1.1
MCEN  (via drill 0.51)
  Top 0.203: IC4.1 62.48,26.42 60.45,26.42 59.94,25.91 59.94,25.15 55.37,20.57 48.51,20.57 46.74,18.8 v44.2,18.8 | IC2.12 34.4,21.1 v34.42,21.08
  Bottom 0.203: v34.42,21.08 34.8,21.08 37.47,18.41 43.81,18.41 v44.2,18.8
MCO0
  Top 0.61: U$5.1 65.28,27.05 60.2,27.05 58.55,25.4 IC4.3
MCO1
  Top 0.61: U$5.2 71.75,22.48 69.85,24.38 69.22,24.38 65.66,27.94 59.82,27.94 58.55,26.67 52.07,26.67 IC4.6
MCPWM  (via drill 0.51)
  Top 0.203: IC4.2 55.63,20.07 48.77,20.07 47.24,18.54 47.24,17.65 46.23,16.64 45.21,16.64 44.7,16.64 v44.32,17.02 | IC2.14 33.84,19.5 34.16,19.18 34.16,18.92 v34.54,18.54
  Bottom 0.203: v34.54,18.54 34.54,18.29 35.43,17.4 43.69,17.4 44.07,17.02 v44.32,17.02
MCT0  (via drill 0.51)
  Top 0.203: U$5.5 66.02,22.23 v59.05,22.23 | v57.4,23.88 50.8,23.88 49.4,25.27 49.4,25.78 48.77,26.42 45.09,26.42 42.16,23.5 IC2.32
  Bottom 0.203: v59.05,22.23 v57.4,23.88
MCT1  (via drill 0.51)
  Top 0.203: v73.28,21.34 73.28,22.48 72.64,23.11 72.14,23.11 70.23,25.02 69.6,25.02 66.04,28.57 59.44,28.57 58.17,27.3 51.82,27.3 51.44,26.92 44.96,26.92 43.31,25.27 41.66,25.27 40.89,26.04 39.88,26.04 39.47,25.62 IC2.2
  Bottom 0.203: U$5.6 72.77,19.05 72.77,20.83 v73.28,21.34
MDDIR  (via drill 0.51)
  Top 0.203: IC4.15 59.44,19.3 56.13,19.3 55.88,19.56 51.05,19.56 49.53,18.03 49.53,17.53 48.13,16.13 44.7,16.13 43.43,14.86 v42.16,14.86 | 34.66,16.25 IC2.17 34.51,16.26 v33.91,16.26 | v22.48,22.61 21.59,23.5 21.34,23.5 20.45,24.38 20.45,26.04 J1.3
  Bottom 0.203: v42.16,14.86 41.15,15.88 34.92,15.88 34.54,16.26 v33.91,16.26 32.64,16.26 32.38,16.51 27.94,16.51 22.48,21.97 v22.48,22.61
MDEN  (via drill 0.51)
  Top 0.203: v34.8,19.81 34.29,19.81 33.8,20.3 IC2.13
  Bottom 0.203: v34.8,19.81 36.7,17.91 45.59,17.91 IC4.9
MDO0
  Top 0.61: U$7.1 73.03,8 69.47,8 67.94,9.53 63.75,9.53 57.28,16 52.58,16 IC4.11
MDO1
  Top 0.61: 73.66,6.73 75.56,8.64 75.56,9.91 74.42,11.05 65.15,11.05 IC4.14
  Top 0.813: U$7.2 73.66,6.73
MDPWM  (via drill 0.51)
  Top 0.203: v31.75,19.94 31.75,19.3 32.35,18.7 IC2.15
  Bottom 0.203: IC4.10 47.37,17.78 45.72,16.13 43.94,16.13 43.18,16.89 35.18,16.89 34.42,17.65 34.04,17.65 v31.75,19.94 31.75,22.73 30.86,23.62 30.86,24.38 27.94,27.3 J1.4
MDT0  (via drill 0.51)
  Top 0.203: U$7.5 69.47,9.27 68.58,10.16 64.14,10.16 57.53,16.76 52.83,16.76 52.07,17.53 v52.07,18.67 | v38.86,19.81 38.86,20.19 38.48,20.57 38.48,22.35 40.26,24.13 IC2.1
  Bottom 0.203: v52.07,18.67 51.56,18.67 51.44,18.8 49.53,18.8 49.02,19.3 45.97,19.3 45.09,20.19 43.56,20.19 42.8,19.43 39.24,19.43 v38.86,19.81
MDT1  (via drill 0.51)
  Top 0.203: U$7.6 69.22,7.24 67.56,8.89 63.5,8.89 57.02,15.37 52.2,15.37 50.93,16.64 v49.91,16.64 | v34.42,23.5 IC2.9
  Bottom 0.203: v49.91,16.64 49.66,16.89 49.66,17.91 48.77,18.8 45.72,18.8 44.83,19.68 43.81,19.68 43.05,18.92 37.59,18.92 35.43,21.08 35.43,21.46 34.42,22.48 v34.42,23.5
N$1
  Top 1.778: D1.4 11.68,6.48 11.68,8.38 | IC5.2 5.41,19.05 7.87,19.05 11.68,15.24 11.68,8.38 | U$14.P$2 16.13,8.38 11.68,8.38
N$2
  Top 0.203: FTDI-HEADER.1 12.7,3.56 C5.1
N$3
  Top 0.203: R8.1 79.5,52.83 79.5,48.39 79.12,48.01 LED2.A
N$4
  Top 0.203: R9.1 79.5,3.05 79.5,7.62 79.12,8 LED1.A
N$5
  Top 0.203: C1.1 27.43,30.29 27.43,34.67 28.45,35.69 | 28.45,35.69 XTL1.2 | 28.45,35.69 31.37,32.77 32.64,32.77 32.8,32.92 IC1.7
N$6
  Top 0.203: U$15.13 18.92,51.99 18.92,53.85 19.56,54.48 73.03,54.48 75.44,52.07 75.44,51.44 76.58,50.29 76.58,43.18 76.83,42.93 76.83,40.26 74.04,37.47 74.04,31.75 72.14,29.84 72.14,25.91 75.69,22.35 75.69,17.02 77.34,15.37 77.34,7.75 75.95,6.35 75.95,3.94 78.74,1.14 R9.2
N$7
  Top 0.203: IC1.8 33.04,32.26 32.38,32.26 31.24,32.26 30.29,33.21 | 30.29,33.21 29.34,34.16 XTL1.1 | C2.1 31.56,30.99 29.97,30.99 29.46,31.5 29.46,32.38 30.29,33.21
N$8
  Top 0.203: Q11.1 44.89,41.72 43.94,40.77 R15.2
N$9
  Top 0.406: R22.2 34.25,48.77 Q20.3
N$10
  Top 0.203: R25.2 28.83,43.94 25.65,43.94 24.45,45.15 Q21.1
N$11
  Top 0.203: R7.1 17.14,43.81 R6.2 17.14,45.34 17.14,46.99 16.89,47.24 14.35,47.24 11.3,50.29 11.3,51.18 12.57,52.45 U$15.10
N$12
  Top 0.203: U$15.12 16.84,54.99 78.87,54.99 R8.2
N$13
  Top 0.203: R13.1 49.53,41.02 | 49.53,41.02 R14.1 | Q11.3 48.22,41.02 49.53,41.02
N$14
  Top 0.203: XTL2.2 26.67,19.94 26.67,27.3 C3.1 28.13,28.45 33.66,28.45 33.66,27.43 35.47,25.62 IC2.7
N$15
  Top 0.203: XTL2.1 32.7,27.24 C4.1 34.66,25.34 IC2.8
N$16
  Top 0.203: Q21.3 27.73,47.45 R24.1 R23.1
N$17
  Top 0.203: Q20.1 29.4,48.58 R23.2
N$20
  Top 0.406: Q30.3 27.18,10.54 R32.2
N$21
  Top 0.203: Q31.1 30.5,9.4 28.96,9.4 28.19,10.16 R35.2
N$22
  Top 0.203: R13.2 51.37,41.97 Q10.1
N$23  (via drill 0.51)
  Top 0.203: R33.1 R34.1 v27.56,3.17 | Q31.3 29.89,6.14 v29.59,5.84
  Bottom 0.203: v29.59,5.84 27.56,3.81 v27.56,3.17
N$24
  Top 0.203: R33.2 26.23,5.65 Q30.1
N$25
  Top 0.203: Q10.3 55.71,41.91 R12.2
N$26
  Top 0.406: Q40.3 30.4,1.52 33.02,1.52 R42.2
N$29
  Top 0.203: R50.2 14.99,42.8 11.56,42.8 10.79,43.56 U$12.5
N$30
  Top 0.203: R51.2 15.62,44.96 8.64,44.96 U$12.6
N$31
  Top 0.203: R51.1 10.29,46.1 5.71,50.67 5,50.67 U$15.3
N$32
  Top 0.203: R50.1 16.64,44.2 16.64,46.74 11.48,46.74 U$15.5
N$33
  Top 0.203: Q41.1 34.99,8.57 R45.2
N$34
  Top 0.203: Q41.3 34.04,4.32 R43.1 34.16,2.67 32.51,2.67 R44.1
N$35
  Top 0.203: R43.2 33.4,3.81 32.64,4.57 31.09,4.57 Q40.1
REG_OUT
  Top 0.813: U$14.P$1 18.03,19.18 19.56,17.65 19.56,11.05 24.27,6.34 C8.1
  Top 1.016: F1.1 19.17,30.73 19.18,30.73 19.18,27.81 17.27,25.91 14.35,25.91 C9.+
  Top 1.778: U$14.P$1 14.48,25.53 C9.+
  Bottom 1.778: IC5.4 8.31,15.49 IC6.3 13.97,20.98 C9.+
RPI-FTDI-RX  (via drill 0.51)
  Top 0.203: FTDI-HEADER.2 15.62,1.52 15.62,6.48 v15.37,6.73 | D6.A 24.26,42.75 24.26,43.18 23.5,43.94 20.07,43.94 18.8,42.67 D5.A 17.98,41.91 R7.2 17.14,41.4 | 17.14,41.4 17.14,41.15 R3.1 | v17.27,41.4 17.14,41.4
  Bottom 0.203: v17.27,41.4 14.99,39.12 14.99,32.77 17.27,30.48 17.27,22.99 24.51,15.75 24.51,14.48 25.53,13.46 25.53,9.78 22.61,6.86 21.59,6.86 20.83,7.62 19.81,7.62 18.54,6.35 15.75,6.35 v15.37,6.73
RPI-TX
  Top 0.203: D4.A 21.21,48.01 20.07,46.86 18.03,46.86 16.26,48.64 D3.C 15.49,48.64 13.84,50.29 13.84,53.72 13.08,54.48 11.25,54.48 U$15.8
S1ADC
  Top 0.203: R11.1 59.44,41.53 58.04,40.13 D10.A 55.96,39.24 51.94,39.24 51.82,39.12 47.75,39.12 46.99,38.35 46.99,37.72 43,33.73 IC1.19
S1ANA  (via drill 0.51)
  Top 0.203: 58.29,42.55 60.2,42.55 R11.2 61.72,41.78 R10.1 | v58.17,42.67 58.29,42.55 | 58.29,42.55 R12.1
  Bottom 0.203: U$8.1 54.48,46.35 v58.17,42.67
S1POW  (via drill 0.51)
  Top 0.203: IC1.10 35.43,30.66 v35.43,31.88 | v38.1,35.56 38.73,36.2 39.12,36.2 39.88,36.96 40.39,36.96 40.77,37.34 40.77,38.23 41.02,38.48 41.02,40.01 44.45,43.43 44.45,43.81 45.47,44.83 48.01,44.83 48.51,44.32 48.51,43.56 46.86,41.91 46.86,41.02 46.61,40.77 44.96,40.77 44.7,40.51 44.7,39.62 43.94,38.86 R15.1
  Bottom 0.203: v35.43,31.88 36.7,33.15 36.7,34.42 37.85,35.56 v38.1,35.56
S1SCL  (via drill 0.51)
  Top 0.203: v43.56,43.81 42.67,42.93 42.67,42.42 41.02,40.77 41.02,40.64 40.27,39.88 IC1.25 | U$8.5 57.42,45.59 50.55,45.59 48.01,48.13 47.24,48.13 v46.35,47.24
  Bottom 0.203: v43.56,43.81 44.32,43.05 46.23,43.05 46.74,43.56 46.74,46.86 v46.35,47.24
S1SDA  (via drill 0.51)
  Top 0.203: U$8.6 59.56,47.37 59.69,47.24 59.69,46.23 58.55,45.09 50.29,45.09 48.13,47.24 v47.62,47.24 | v47.62,43.94 47.12,43.94 46.23,43.05 45.34,43.05 42.04,39.75 42.04,38.86 42.8,38.1 42.8,37.34 42.42,36.96 41.79,36.96 IC1.23
  Bottom 0.203: v47.62,47.24 v47.62,43.94
S2ADC  (via drill 0.51)
  Top 0.203: IC1.22 40.96,36.12 40.89,36.07 v40.39,36.07 | v33.15,39.5 33.15,41.1 D20.A 35.05,43 R21.1
  Bottom 0.203: v40.39,36.07 40.01,36.45 39.12,36.45 38.61,36.96 37.59,36.96 36.07,35.43 35.31,35.43 34.67,36.07 34.67,37.97 v33.15,39.5
S2ANA
  Top 0.203: R20.1 R21.2 33.53,45.34 R22.1
  Top 0.406: R22.1 U$9.1
S2POW  (via drill 0.51)
  Top 0.203: IC1.11 36.27,31.44 v36.83,32 | v31.88,40.01 31.5,40.01 29.34,42.16 R25.1
  Bottom 0.203: v36.83,32 36.83,32.64 37.21,33.02 37.21,34.04 37.85,34.67 38.48,34.67 38.99,35.18 38.99,35.94 38.48,36.45 37.72,36.45 36.2,34.92 35.18,34.92 34.16,35.94 34.16,37.08 32.13,39.12 32.13,39.75 v31.88,40.01
S2SCL  (via drill 0.51)
  Top 0.203: v39.5,40.39 39.47,40.35 IC1.26 | U$9.5 43.31,46.74 40.26,43.69 v40.26,43.18
  Bottom 0.203: v40.26,43.18 40.26,41.15 v39.5,40.39
S2SDA  (via drill 0.51)
  Top 0.203: IC1.24 41.53,37.95 41.53,39.88 45.59,43.94 v45.85,43.94
  Bottom 0.203: U$9.6 44.96,49.15 44.96,44.83 v45.85,43.94
S3ADC
  Top 0.203: R31.1 30.66,14.22 D30.A 30.99,14.15 32.21,15.37 36.07,15.37 36.27,15.56 IC2.19
S3ANA  (via drill 0.51)
  Top 0.406: R32.1 26.92,12.7 27.43,12.19 29.46,12.19 | 29.46,12.19 R30.1 | 29.46,12.19 R31.2 | 29.46,12.19 v31.37,12.19
  Bottom 0.406: U$10.1 44.83,10.41 42.55,12.7 31.88,12.7 v31.37,12.19
S3POW
  Top 0.203: R35.1 28.19,14.61 30.86,17.27 30.86,18.8 30.35,19.3 30.35,20.57 32.51,22.73 33.14,22.73 IC2.10
S3SCL
  Top 0.203: U$10.5 40.75,15.35 41.78,16.38 41.78,17.88 IC2.25
S3SDA
  Top 0.203: U$10.6 39.75,8.13 39.24,8.64 39.24,10.03 39.5,10.29 39.5,16.38 IC2.23
S4ADC
  Top 0.203: R41.1 34.34,14.1 D40.A 36.75,13.77 38.61,15.62 38.61,16.35 IC2.22
S4ANA  (via drill 0.51)
  Top 0.203: R41.2 33.02,12.06 R40.1
  Top 0.406: R42.1 36.32,1.78 38.1,3.56 v38.1,9.4 35.43,12.06 33.02,12.06 | U$11.1 57.15,11.68 v42.16,11.68
  Bottom 0.406: v42.16,11.68 40.39,11.68 v38.1,9.4
S4POW  (via drill 0.51)
  Top 0.203: R45.1 v32.89,8.76 | v30.73,15.49 30.73,16.51 31.37,17.14 31.37,18.92 30.86,19.43 30.86,20.45 32.26,21.84 33.12,21.84 IC2.11
  Bottom 0.203: v32.89,8.76 30.48,8.76 28.57,10.67 28.57,13.34 v30.73,15.49
S4SCL
  Top 0.203: IC2.26 42.51,18.7 42.8,18.41 42.8,17.4 42.29,16.89 42.29,16.26 41.27,15.24 41.27,11.3 41.78,10.79 45.47,10.79 49.02,7.24 53.45,7.24 U$11.5
S4SDA
  Top 0.203: U$11.6 48.9,6.73 45.34,10.29 42.29,10.29 41.77,9.77 41.77,8.75 41.27,8.26 40.26,8.26 39.73,8.79 39.73,9.88 40.26,10.41 IC2.24
VCC  (via drill 0.51)
  Top 0.203: IC3.8 46.48,38.86 46.74,38.86 47.5,39.62 50.93,39.62 51.05,39.75 | R14.2 51.05,39.75 | Q10.2 52.3,39.75 51.05,39.75 | Q20.2 30.03,46.67 R24.2 | R34.2 28.13,5.59 | R44.2 31.5,3.17 29.97,3.17 28.89,4.25 Q40.2
  Top 0.406: Q20.2 30.9,46.02 v30.73,45.85 | Q40.2 28.13,5.04 28.13,5.59 Q30.2 28.13,7.18 v27.56,7.75
  Top 1.27: C6.1 3.06,10.97 JP2.2
  Bottom 0.406: v30.73,45.85 30.73,43.69 | v27.56,7.75 26.98,8.33
  Bottom 1.27: IC4.8 44.07,27.05 44.07,31.24 42.67,32.64 42.67,38.1 | 42.67,38.1 IC3.8 | 42.67,38.1 41.66,39.12 41.66,43.81 40.89,44.58 37.08,44.58 36.2,43.69 30.73,43.69 21.97,43.69 20.07,41.78 20.07,40.26 19.3,39.5 19.43,23.62 27.6,15.45 27.6,8.96 26.98,8.33 23.47,4.83 13.59,4.83 C7.+
  Bottom 1.778: C7.+ 7.44,10.97 JP2.2 1.68,11.38 IC5.1 IC6.1

## Text on the board
bNames: C:/Users/John/Desktop/Dexter Industries/Projects/RaspberryPi/02 BrickPi/BrickPi/LOGO.bmp